# EAGLE board lme49600_headamp (EAGLE 7.4.0)
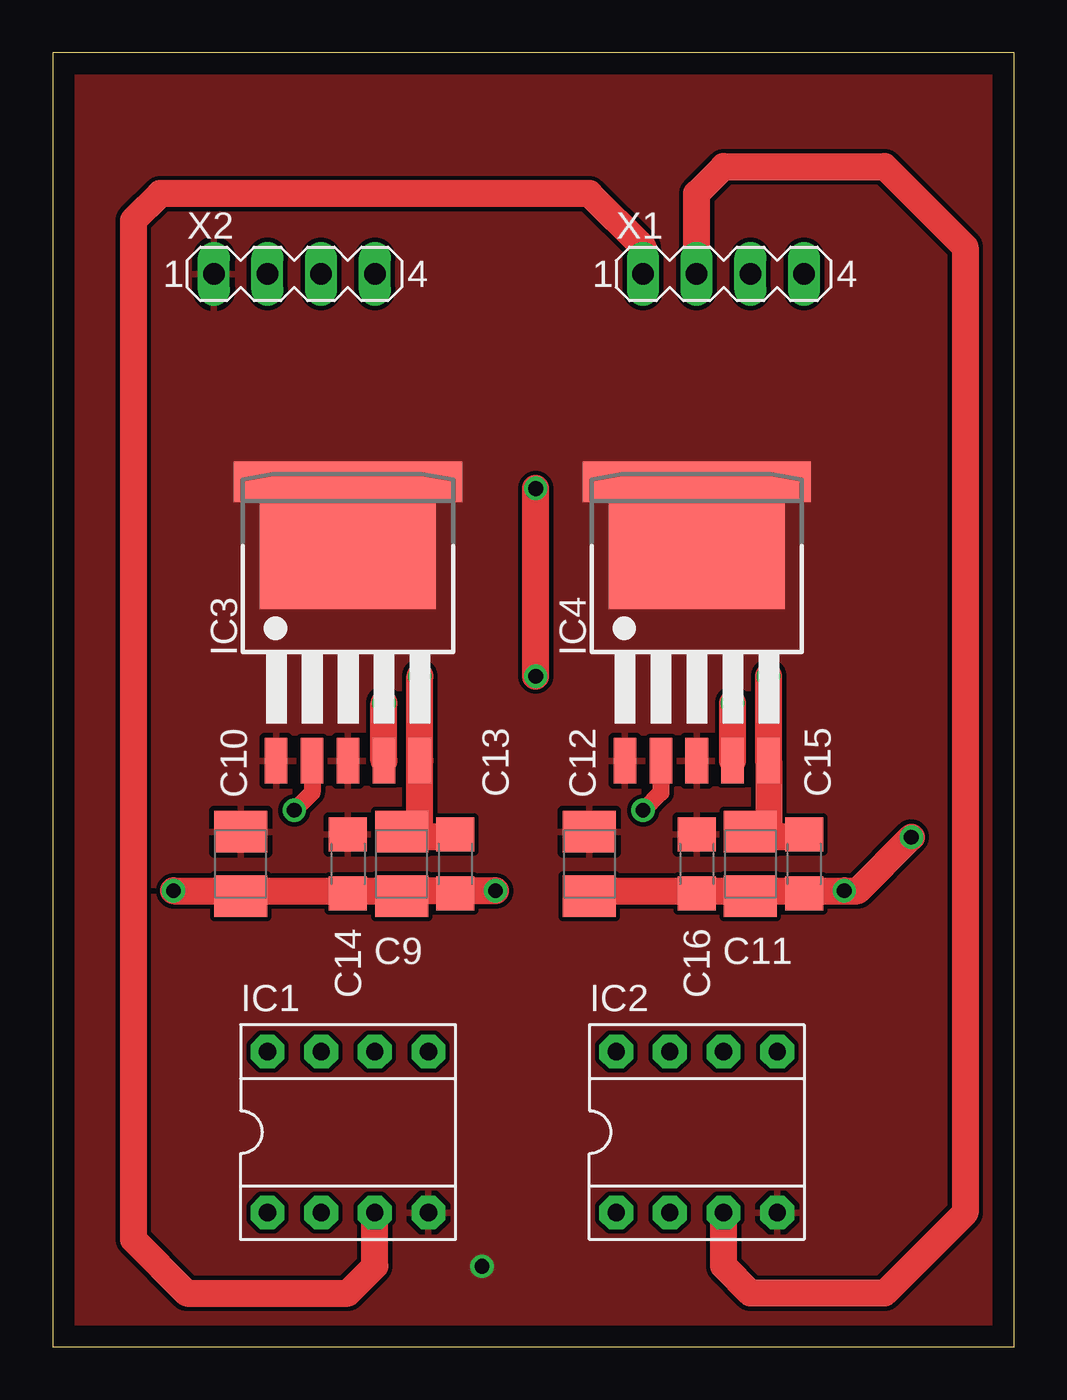
[diagram p0: board, top side]
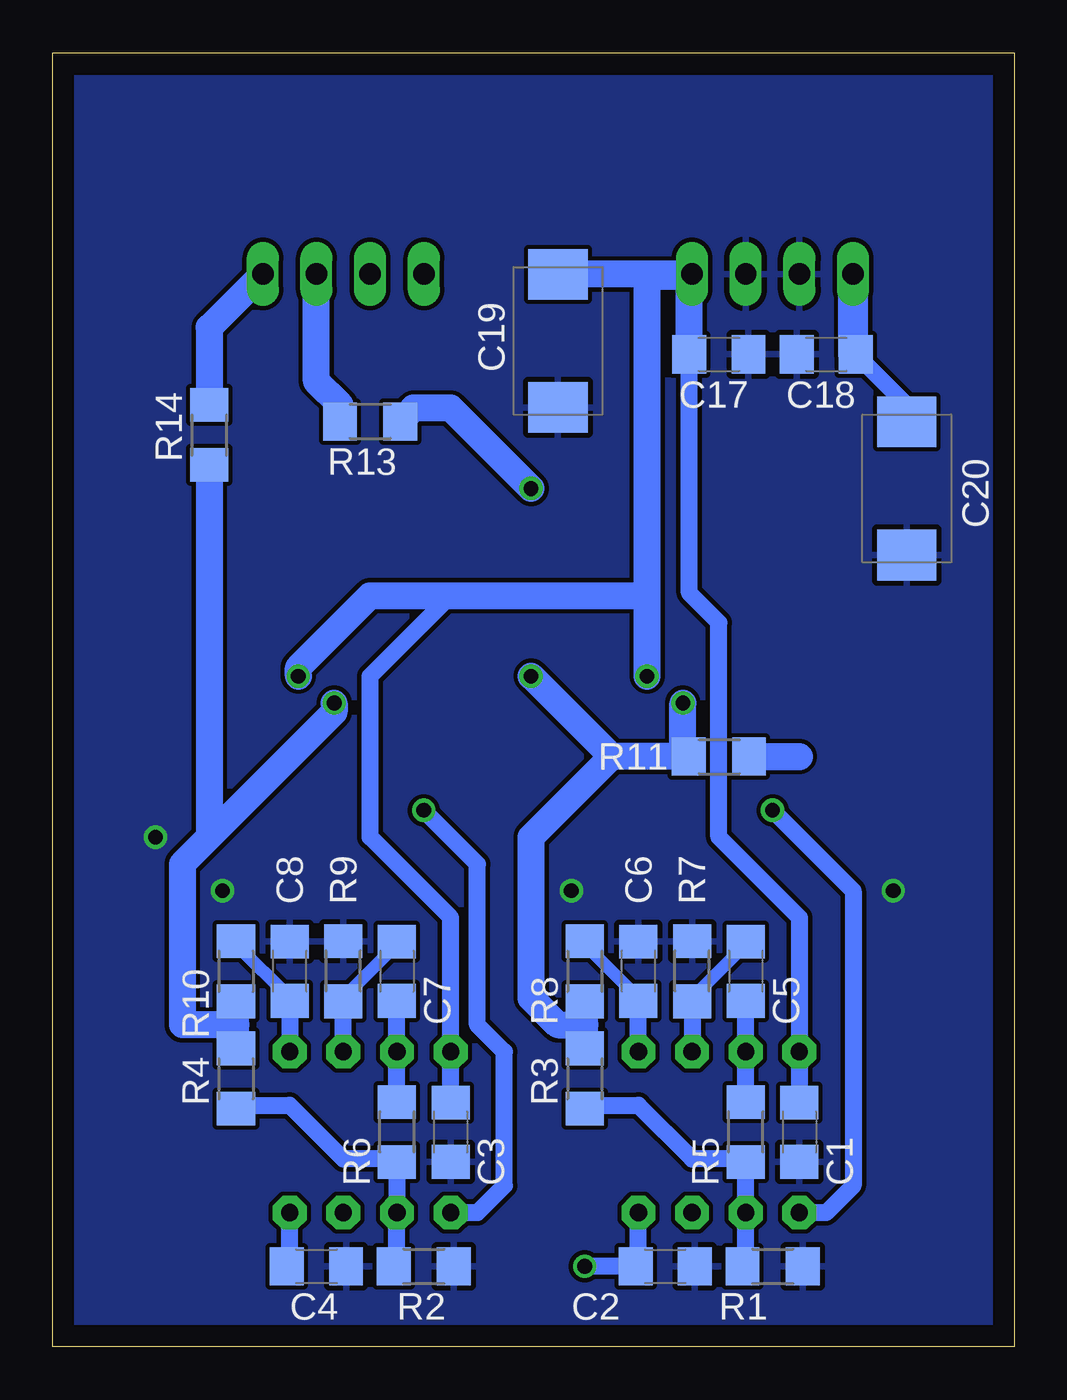
[diagram p1: board, bottom side, seen from below]

Size 45.5 x 61.27 mm. Coordinates in mm from the lower left corner, seen from the top.
Outline: 0,0 45.5,0 45.5,61.27 0,61.27 0,0
Copper layers (1*16): Top 0.035mm / dielectric 1.5mm / Bottom 0.035mm
Design rules "default *": minimum track width 10mil, minimum drill 24mil, track to track 8mil, track to pad 8mil, pad to pad 8mil, via to via 8mil, smd to smd 8mil, copper to edge 40mil, drill to drill 8mil, minimum pad ring 10mil, minimum via ring 8mil, stop-mask expansion 4mil, vias tented up to drill 0mil, thermal gap 10mil

## Footprints (pad centres in the part's own frame; a part is rotated, then mirrored left to right if it is on the bottom)
C1206 = smd 1.6 x 1.8: 1 -1.4,0; 2 1.4,0
B/3528-21R = smd 1.95 x 2.5: + 1.525,0; - -1.525,0
SMC_D = smd 2.4 x 2.8: + -3.15,0; - 3.15,0
DIL08 = drill 0.813 pad 1.6 octagon: 1 -3.81,-3.81; 2 -1.27,-3.81; 3 1.27,-3.81; 4 3.81,-3.81; 5 3.81,3.81; 6 1.27,3.81; 7 -1.27,3.81; 8 -3.81,3.81
TS5B = smd 1.07 x 2.16: 1 -3.4,-6.55; 2 -1.7,-6.55; 3 0,-6.55; 4 1.7,-6.55; 5 3.4,-6.55 | smd 10.8 x 1.91: TH@1 0,6.665 | smd 8.33 x 6: TH@2 0,3.635
R1206 = smd 1.6 x 1.803: 1 -1.422,0; 2 1.422,0
MA04-1 = drill 1.016 long: 1 -3.81,0; 2 -1.27,0; 3 1.27,0; 4 3.81,0

## Placement (x,y rotation side)
C1  1uF  [C1206]  10.16,10.16 270 bottom
C2  1uF  [C1206]  16.51,3.81 0 bottom
C3  1uF  [C1206]  26.67,10.16 270 bottom
C4  1uF  [C1206]  33.02,3.81 0 bottom
C5  1uF  [C1206]  12.7,17.78 270 bottom
C6  1uF  [C1206]  17.78,17.78 90 bottom
C7  1uF  [C1206]  29.21,17.78 270 bottom
C8  1uF  [C1206]  34.29,17.78 90 bottom
C9  4u7/25V  [B/3528-21R]  16.51,22.86 90 top
C10  4u7/25V  [B/3528-21R]  8.89,22.86 270 top
C11  4u7/25V  [B/3528-21R]  33.02,22.86 90 top
C12  4u7/25V  [B/3528-21R]  25.4,22.86 270 top
C13  100nF  [C1206]  19.05,22.86 270 top
C14  100nF  [C1206]  13.97,22.86 270 top
C15  100nF  [C1206]  35.56,22.86 270 top
C16  100nF  [C1206]  30.48,22.86 270 top
C17  100nF  [C1206]  13.97,46.99 0 bottom
C18  100nF  [C1206]  8.89,46.99 0 bottom
C19  100uF/16V  [SMC_D]  21.59,47.62 270 bottom
C20  100uF/16V  [SMC_D]  5.08,40.64 90 bottom
IC1  LME49720  [DIL08]  13.97,10.16 0 top
IC2  LME49720  [DIL08]  30.48,10.16 0 top
IC3  LME49600  [TS5B]  13.97,34.29 0 top
IC4  LME49600  [TS5B]  30.48,34.29 0 top
R1  1k  [R1206]  11.43,3.81 180 bottom
R2  1k  [R1206]  27.94,3.81 180 bottom
R3  1k  [R1206]  20.32,12.7 90 bottom
R4  1k  [R1206]  36.83,12.7 90 bottom
R5  1k  [R1206]  12.7,10.16 270 bottom
R6  1k  [R1206]  29.21,10.16 270 bottom
R7  1M  [R1206]  15.24,17.78 270 bottom
R8  1M  [R1206]  20.32,17.78 90 bottom
R9  1M  [R1206]  31.75,17.78 270 bottom
R10  1M  [R1206]  36.83,17.78 90 bottom
R11  10R  [R1206]  13.97,27.94 180 bottom
R13  10R  [R1206]  30.48,43.81 180 bottom
R14  10R  [R1206]  38.1,43.18 90 bottom
X1  S1G4  [MA04-1]  31.75,50.8 0 top
X2  S1G4  [MA04-1]  11.43,50.8 0 top

## Library data of the parts
C1-C20 R1-R11 R13 R14 = rcl
IC1 IC2 = burr-brown; MF: TEXAS INSTRUMENTS; MPN: OPA2134PA; OC_FARNELL: 1097574; OC_NEWARK: 74K3897
IC3 IC4 = national-semiconductor
X1 X2 = con-lstb; OC_FARNELL: unknown; OC_NEWARK: unknown

## Nets
GND: C1.2 C2.2 C3.2 C4.2 C6.2 C8.2 C9.- C10.+ C11.- C12.+ C13.2 C14.2 C15.2 C16.2 C17.2 C18.1 C19.- C20.+ R1.1 R2.1 R7.1 R9.1 X2.2 X2.3
LOUT: R13.2 X1.3
N$1: IC1.1 IC3.2
N$2: IC2.3 X1.2
N$3: IC1.2 R1.2 R3.1 R5.2
N$4: IC2.1 IC4.2
N$5: IC3.4 R3.2 R8.1 R11.2 R13.1
N$6: IC1.3 X1.1
N$10: C5.1 IC1.6 R7.2
N$11: C6.1 IC1.5 R8.2
N$12: C5.2 IC1.7 R5.1
N$14: IC2.2 R2.2 R4.1 R6.2
N$15: C7.2 IC2.7 R6.1
N$17: C7.1 IC2.6 R9.2
N$18: C8.1 IC2.5 R10.2
N$19: IC4.4 R4.2 R10.1 R14.1
N$20: R11.1
ROUT: R14.2 X1.4
VCC: C1.1 C3.1 C9.+ C11.+ C13.1 C15.1 C17.1 C19.+ IC1.8 IC2.8 IC3.5 IC4.5 X2.4
VEE: C2.1 C4.1 C10.- C12.- C14.1 C16.1 C18.2 C20.- IC1.4 IC2.4 IC3.1 IC3.3 IC3.TH@1 IC3.TH@2 IC4.1 IC4.3 IC4.TH@1 IC4.TH@2 X2.1

## Tracks (layer width: path | path; a pad name or v marks a point on that pad's centre or on a via)
GND  (via drill 0.7)
  Top 1.27: v5.71,21.59 8.89,21.59 | 8.89,21.59 13.97,21.59 | 13.97,21.59 16.51,21.59 C9.- 17.14,21.34 17.14,21.59 19.05,21.59 | C12.+ 25.4,21.59 30.48,21.59 | C16.2 30.48,21.59 | 30.48,21.59 33.02,21.59 | C11.- 33.02,21.59 | 33.02,21.59 35.56,21.59 | C10.+ 8.89,21.59 | C15.2 35.56,21.59 | 35.56,21.59 v37.47,21.59 38.1,21.59 v40.64,24.13 | v20.95,21.59 19.05,21.59 | C13.2 19.05,21.59 | C14.2 13.97,21.59
  Bottom 0.813: C8.2 34.29,19.05
  pour Bottom (rank 2): -16.51,-3.81 -16.51,60.33 64.77,60.33 64.77,-3.81
LOUT
  Bottom 1.27: R13.2 31.9,44.6 33.02,45.72 X1.3
N$1  (via drill 0.7)
  Top 0.813: IC3.2 12.27,26.24 v11.43,25.4
  Bottom 0.813: IC1.1 8.89,6.35 7.62,7.62 7.62,21.59 v11.43,25.4
N$2
  Top 1.27: X1.2 30.48,54.61 31.75,55.88 39.37,55.88 43.18,52.07 43.18,6.35 39.37,2.54 33.02,2.54 31.75,3.81 IC2.3
N$3
  Bottom 0.813: R1.2 12.7,3.81 IC1.2 R5.2 12.7,8.89 15.24,8.89 17.78,11.43 20.32,11.43 R3.1
N$4  (via drill 0.7)
  Top 0.813: IC4.2 28.78,26.24 v27.94,25.4
  Bottom 0.813: IC2.1 25.4,6.35 24.13,7.62 24.13,13.97 25.4,15.24 25.4,22.86 v27.94,25.4
N$5  (via drill 0.7)
  Top 1.27: IC3.4 v15.67,30.48 | v22.86,31.75 v22.86,40.64
  Bottom 1.27: R3.2 20.32,15.24 | 20.32,15.24 R8.1 | 20.32,15.24 21.59,15.24 22.86,16.51 22.86,24.13 19.05,27.94 | 15.67,27.94 19.05,27.94 | 15.67,27.94 v15.67,30.48 | R11.2 15.67,27.94 | 19.05,27.94 v22.86,31.75 | v22.86,40.64 26.67,44.45 28.42,44.45 R13.1
N$6
  Top 1.27: IC1.3 15.24,3.81 13.97,2.54 6.35,2.54 3.81,5.08 3.81,53.34 5.08,54.61 25.4,54.61 27.94,52.07 X1.1
N$10
  Bottom 0.61: 15.24,16.51 12.7,19.05
  Bottom 0.813: C5.1 12.7,19.05 | 15.24,16.51 R7.2 IC1.6
N$11
  Bottom 0.61: 17.78,16.51 20.32,19.05
  Bottom 0.813: IC1.5 C6.1 17.78,16.51 | 20.32,19.05 R8.2
N$12
  Bottom 0.813: R5.1 IC1.7 C5.2
N$14
  Bottom 0.813: R2.2 29.21,3.81 IC2.2 R6.2 29.21,8.89 31.75,8.89 34.29,11.43 36.83,11.43 R4.1
N$15
  Bottom 0.813: R6.1 IC2.7 C7.2
N$17
  Bottom 0.61: 29.21,19.05 31.75,16.51
  Bottom 0.813: C7.1 29.21,19.05 | IC2.6 R9.2 31.75,16.51
N$18
  Bottom 0.61: 36.83,19.05 34.29,16.51
  Bottom 0.813: IC2.5 C8.1 34.29,16.51 | R10.2 36.83,19.05
N$19  (via drill 0.7)
  Top 1.27: IC4.4 v32.18,30.48
  Bottom 1.27: R4.2 36.83,15.24 | 36.83,15.24 R10.1 | v32.18,30.48 32.18,30.05 38.1,24.13 | 36.83,15.24 39.37,15.24 39.37,22.86 38.1,24.13 | R14.1 38.1,24.13
N$20
  Bottom 1.27: R11.1 10.16,27.94
ROUT
  Bottom 1.27: X1.4 38.1,48.26 R14.2
VCC  (via drill 0.7)
  Top 1.27: 33.88,24.13 IC4.5 v33.88,31.75 | C15.1 35.56,24.13 33.88,24.13 | C11.+ 33.02,24.13 33.88,24.13 | C13.1 19.05,24.13 16.51,24.13 C9.+ 17.37,24.39 IC3.5 v17.37,31.75
  Bottom 0.813: C3.1 IC2.8 26.67,20.32 30.48,24.13 30.48,31.75 26.67,35.56 | C1.1 IC1.8 10.16,20.32 13.97,24.13 13.97,34.29 15.37,35.69 C17.1
  Bottom 1.27: v33.88,31.75 33.88,32.16 30.48,35.56 26.67,35.56 17.37,35.56 | v17.37,31.75 17.37,35.56 | 17.37,35.56 17.37,50.6 17.3,50.67 15.37,50.67 | C17.1 15.37,50.67 | 15.37,50.67 X2.4 21.57,50.8 C19.+
VEE  (via drill 0.7)
  Bottom 0.813: IC1.4 17.78,3.81 C2.1 v20.32,3.81 | C4.1 34.29,3.81 IC2.4 | C20.- 5.08,44.58 C18.2
  Bottom 1.422: C18.2 7.62,46.99 X2.1
  pour Top: -16.51,-3.81 -16.51,60.33 64.77,60.33 64.77,-3.81
  pour Top (no thermals): 7.62,43.18 7.62,33.02 36.83,33.02 36.83,43.18